# EAGLE board hamdallv2 (EAGLE 9.3.0)
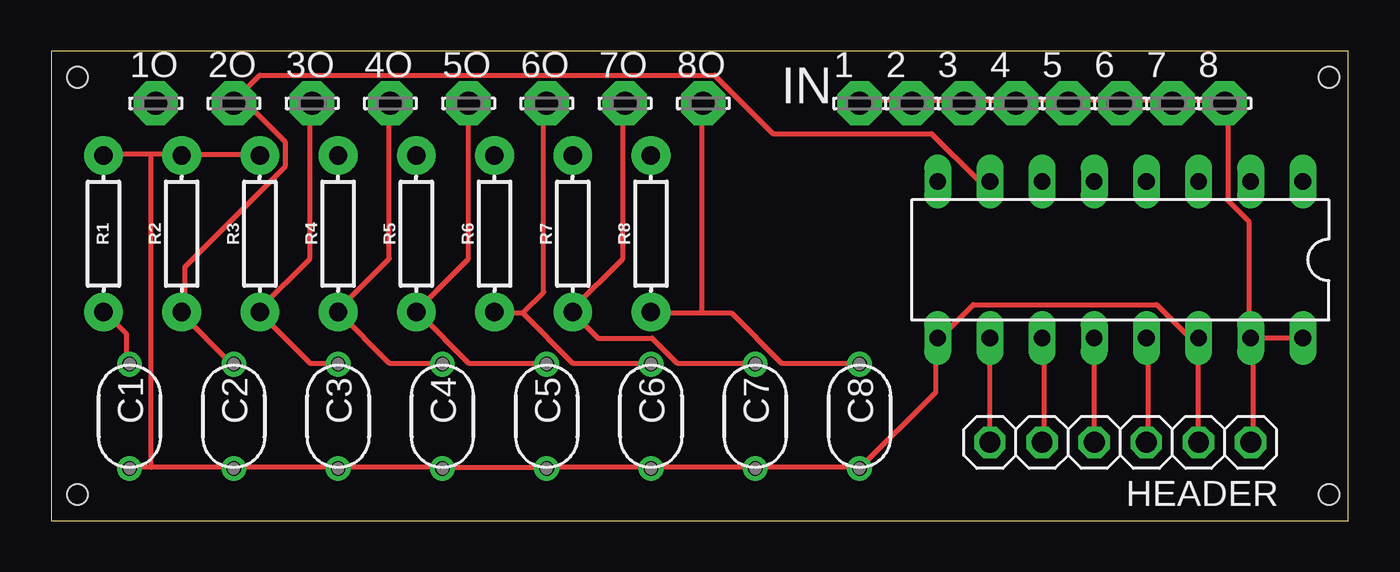
[diagram p0: board, top side]
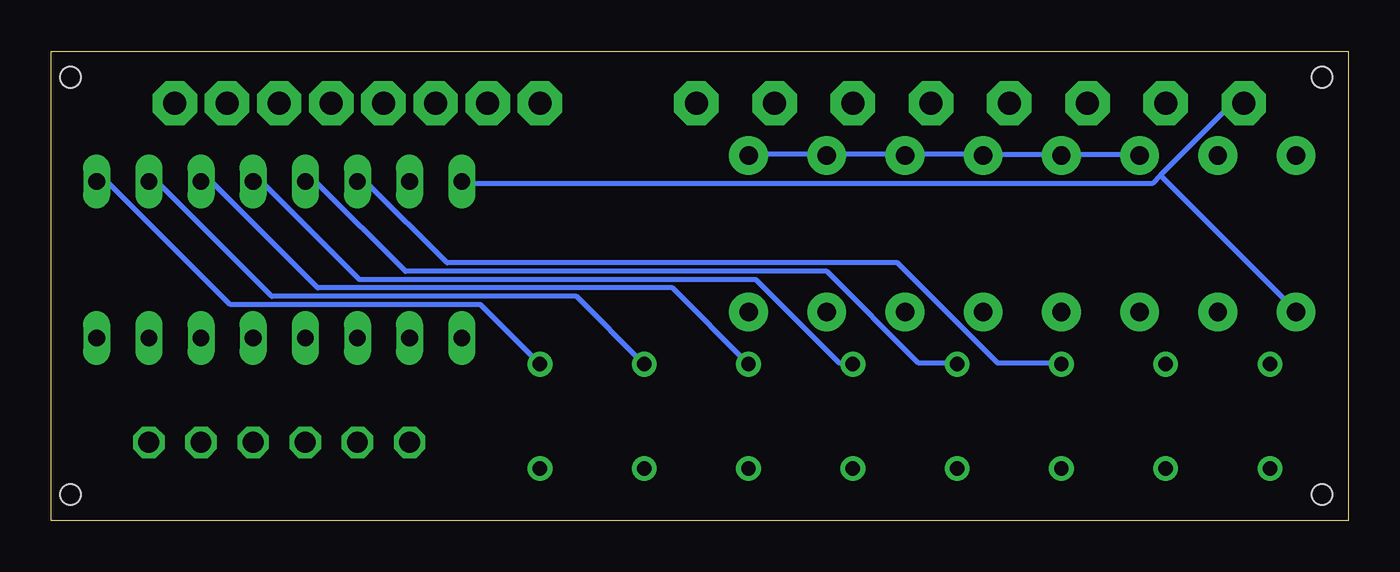
[diagram p1: board, bottom side, seen from below]

Size 63.17 x 22.85 mm. Coordinates in mm from the lower left corner, seen from the top.
Outline: 0,0 63.17,0 63.17,22.85 0,22.85 0,0
Copper layers (1*16): Top 0.035mm / dielectric 1.5mm / Bottom 0.035mm
Design rules "default": minimum track width 6mil, minimum drill 0.35mm, track to track 6mil, track to pad 6mil, pad to pad 6mil, via to via 6mil, smd to smd 6mil, copper to edge 40mil, drill to drill 6mil, minimum pad ring 10mil, minimum via ring 8mil, stop-mask expansion 4mil, vias tented up to drill 0mil, thermal gap 10mil
Net classes: 0 default: width 0.254 mm
Holes 1 mm at 1.27,1.27 62.23,21.59 1.27,21.59 62.23,1.27

## Footprints (pad centres in the part's own frame; a part is rotated, then mirrored left to right if it is on the bottom)
LSP11 = drill 1.118 pad 2.159 octagon: MP 0,0
050X030_050 = drill 0.7: 1 -2.54,0; 2 2.54,0
1X06 = drill 1.016 octagon: 1 -6.35,0; 2 -3.81,0; 3 -1.27,0; 4 1.27,0; 5 3.81,0; 6 6.35,0
DIL16 = drill 0.813 long: 1 -8.89,-3.81; 2 -6.35,-3.81; 3 -3.81,-3.81; 4 -1.27,-3.81; 5 1.27,-3.81; 6 3.81,-3.81; 7 6.35,-3.81; 8 8.89,-3.81; 9 8.89,3.81; 10 6.35,3.81; 11 3.81,3.81; 12 1.27,3.81; 13 -1.27,3.81; 14 -3.81,3.81; 15 -6.35,3.81; 16 -8.89,3.81
AXIAL-0.3 = drill 0.9 pad 1.88: P$1 -3.81,0; P$2 3.81,0

## Placement (x,y rotation side)
1  LSP11  [LSP11]  39.37,20.32 0 top
1O  LSP11  [LSP11]  5.08,20.32 0 top
2  LSP11  [LSP11]  41.91,20.32 0 top
2O  LSP11  [LSP11]  8.89,20.32 0 top
3  LSP11  [LSP11]  44.45,20.32 0 top
3O  LSP11  [LSP11]  12.7,20.32 0 top
4  LSP11  [LSP11]  46.99,20.32 0 top
4O  LSP11  [LSP11]  16.51,20.32 0 top
5  LSP11  [LSP11]  49.53,20.32 0 top
5O  LSP11  [LSP11]  20.32,20.32 0 top
6  LSP11  [LSP11]  52.07,20.32 0 top
6O  LSP11  [LSP11]  24.13,20.32 0 top
7  LSP11  [LSP11]  54.61,20.32 0 top
7O  LSP11  [LSP11]  27.94,20.32 0 top
8  LSP11  [LSP11]  57.15,20.32 0 top
8O  LSP11  [LSP11]  31.75,20.32 0 top
C1  10nF  [050X030_050]  3.81,5.08 270 top
C2  10nF  [050X030_050]  8.89,5.08 270 top
C3  10nF  [050X030_050]  13.97,5.08 270 top
C4  10nF  [050X030_050]  19.05,5.08 270 top
C5  10nF  [050X030_050]  24.13,5.08 270 top
C6  10nF  [050X030_050]  29.21,5.08 270 top
C7  10nF  [050X030_050]  34.29,5.08 270 top
C8  10nF  [050X030_050]  39.37,5.08 270 top
HEADER  [1X06]  52.07,3.81 180 top
IC1  MCP3008  [DIL16]  52.07,12.7 180 top
R1  100k  [AXIAL-0.3]  2.54,13.97 90 top
R2  100k  [AXIAL-0.3]  6.35,13.97 90 top
R3  100k  [AXIAL-0.3]  10.16,13.97 90 top
R4  100k  [AXIAL-0.3]  13.97,13.97 90 top
R5  100k  [AXIAL-0.3]  17.78,13.97 90 top
R6  100k  [AXIAL-0.3]  21.59,13.97 90 top
R7  100k  [AXIAL-0.3]  25.4,13.97 90 top
R8  100k  [AXIAL-0.3]  29.21,13.97 90 top

## Library data of the parts
1 1O 2 2O 3 3O 4 4O 5 5O 6 6O 7 7O 8 8O = solpad
C1-C8 = gm-caps-ceramic
HEADER IC1 = adafruit
R1-R8 = SparkFun-Resistors; PROD_ID: RES-12184

## Nets
GND: C1.2 C2.2 C3.2 C4.2 C5.2 C6.2 C7.2 C8.2 HEADER.2 IC1.9 IC1.14 R1.P$2 R2.P$2 R3.P$2 R4.P$2 R5.P$2 R6.P$2 R7.P$2 R8.P$2
N$2: 2O.MP C2.1 IC1.7 R2.P$1
N$3: 7O.MP C7.1 IC1.2 R7.P$1
N$4: 3O.MP C3.1 IC1.6 R3.P$1
N$5: 4O.MP C4.1 IC1.5 R4.P$1
N$6: 5O.MP C5.1 IC1.4 R5.P$1
N$7: 6O.MP C6.1 IC1.3 R6.P$1
N$8: 8O.MP C8.1 IC1.1 R8.P$1
N$9: 1O.MP C1.1 IC1.8 R1.P$1
N$11: HEADER.3 IC1.13
N$12: HEADER.4 IC1.12
N$13: HEADER.5 IC1.11
N$14: HEADER.6 IC1.10
PWR: 1.MP 2.MP 3.MP 4.MP 5.MP 6.MP 7.MP 8.MP HEADER.1 IC1.15 IC1.16

## Tracks (layer width: path | path; a pad name or v marks a point on that pad's centre or on a via)
GND
  Top 0.254: 4.88,17.83 6.3,17.83 R2.P$2 6.5,17.83 10.16,17.83 R3.P$2 | 4.88,17.83 2.64,17.83 R1.P$2 | 4.88,2.59 8.74,2.59 C2.2 8.94,2.59 13.82,2.59 C3.2 14.02,2.59 18.9,2.59 C4.2 19.1,2.59 23.98,2.59 C5.2 24.18,2.59 29.06,2.59 C6.2 29.26,2.59 34.14,2.59 C7.2 34.34,2.59 39.22,2.59 C8.2 43.08,6.25 43.08,8.89 IC1.9 43.28,8.89 44.91,10.52 53.85,10.52 55.47,8.89 IC1.14 HEADER.2 | 4.88,2.59 3.86,2.59 C1.2 | 4.88,2.59 4.88,17.83
  Bottom 0.254: 25.4,17.83 21.74,17.83 R6.P$2 21.54,17.83 17.88,17.83 R5.P$2 17.68,17.83 14.02,17.83 R4.P$2 13.82,17.83 10.16,17.83 R3.P$2 | 25.4,17.83 29.06,17.83 R8.P$2 | 25.4,17.83 R7.P$2
N$2
  Top 0.254: C2.1 8.74,7.67 6.3,10.11 R2.P$1 6.5,10.31 6.5,12.34 11.38,17.22 11.38,18.44 9.14,20.68 | 9.14,20.68 8.94,20.47 2O.MP 9.14,20.68 | 9.14,20.68 10.16,21.69 32.31,21.69 35.15,18.85 42.88,18.85 45.11,16.61 45.72,16.61 IC1.7
N$3
  Top 0.254: C7.1 34.14,7.67 30.48,7.67 29.26,8.89 26.62,8.89 25.4,10.11 R7.P$1 25.4,10.31 27.84,12.75 27.84,20.27 7O.MP
  Bottom 0.254: C7.1 37.59,10.92 52.43,10.92 57.91,16.41 58.32,16.41 IC1.2
N$4
  Top 0.254: C3.1 13.82,7.67 12.6,7.67 10.16,10.11 R3.P$1 10.16,10.31 12.6,12.75 12.6,20.27 3O.MP
  Bottom 0.254: IC1.6 48.16,16.41 47.75,16.41 43.89,12.55 21.95,12.55 17.07,7.67 14.02,7.67 C3.1
N$5
  Top 0.254: C4.1 18.9,7.67 16.46,7.67 R4.P$1 14.02,10.31 16.46,12.75 16.46,20.27 4O.MP
  Bottom 0.254: IC1.5 50.8,16.41 50.19,16.41 45.92,12.14 25.4,12.14 20.93,7.67 19.1,7.67 C4.1
N$6
  Top 0.254: C5.1 23.98,7.67 20.32,7.67 17.88,10.11 R5.P$1 17.88,10.31 20.32,12.75 5O.MP
  Bottom 0.254: IC1.4 53.24,16.41 52.83,16.41 48.16,11.74 28.85,11.74 24.79,7.67 24.18,7.67 C5.1
N$7
  Top 0.254: 22.96,10.11 25.4,7.67 29.06,7.67 C6.1 | 22.96,10.11 21.74,10.11 R6.P$1 | 22.96,10.11 23.98,11.13 23.98,20.27 6O.MP
  Bottom 0.254: C6.1 32.92,11.33 50.19,11.33 55.27,16.41 55.88,16.41 IC1.3
N$8
  Top 0.254: 31.7,10.11 29.26,10.11 R8.P$1 | 31.7,10.11 33.12,10.11 35.56,7.67 39.22,7.67 C8.1 | 31.7,10.11 31.7,20.27 8O.MP
  Bottom 0.254: C8.1 42.27,10.52 54.46,10.52 60.35,16.41 60.96,16.41 IC1.1
N$9
  Top 0.254: C1.1 3.66,7.67 3.66,9.09 2.64,10.11 R1.P$1
  Bottom 0.254: 9.14,16.82 5.69,20.27 5.08,20.27 1O.MP | 9.14,16.82 9.55,16.41 43.08,16.41 IC1.8 | 9.14,16.82 2.64,10.31 R1.P$1
N$11
  Top 0.254: IC1.13 53.44,8.89 53.44,3.81 HEADER.3
N$12
  Top 0.254: HEADER.4 IC1.12
N$13
  Top 0.254: IC1.11 48.36,8.89 48.36,3.81 HEADER.5
N$14
  Top 0.254: HEADER.6 IC1.10
PWR
  Top 0.254: 1.MP 39.42,20.47 41.86,20.47 2.MP 42.06,20.47 44.3,20.47 3.MP 44.5,20.47 46.94,20.47 4.MP 47.14,20.47 49.38,20.47 5.MP 49.58,20.47 52.02,20.47 6.MP 52.22,20.47 54.46,20.47 7.MP 54.66,20.47 57.1,20.47 8.MP 57.3,20.27 57.3,15.6 58.32,14.58 58.32,8.89 IC1.15 58.52,8.89 | IC1.16 58.52,8.89 | 58.52,8.89 58.52,3.81 HEADER.1

## Text on the board
tNames: IN